# Altium PCB PCB2.PcbDoc
Units mm, origin at the board's own origin, x right, y up, seen from the top; angles counter-clockwise.
Board outline 40.62 x 61.3 mm, 2 copper layers (Top Layer, Bottom Layer); 21 components, 16 nets, 87 pads, 113 vias.
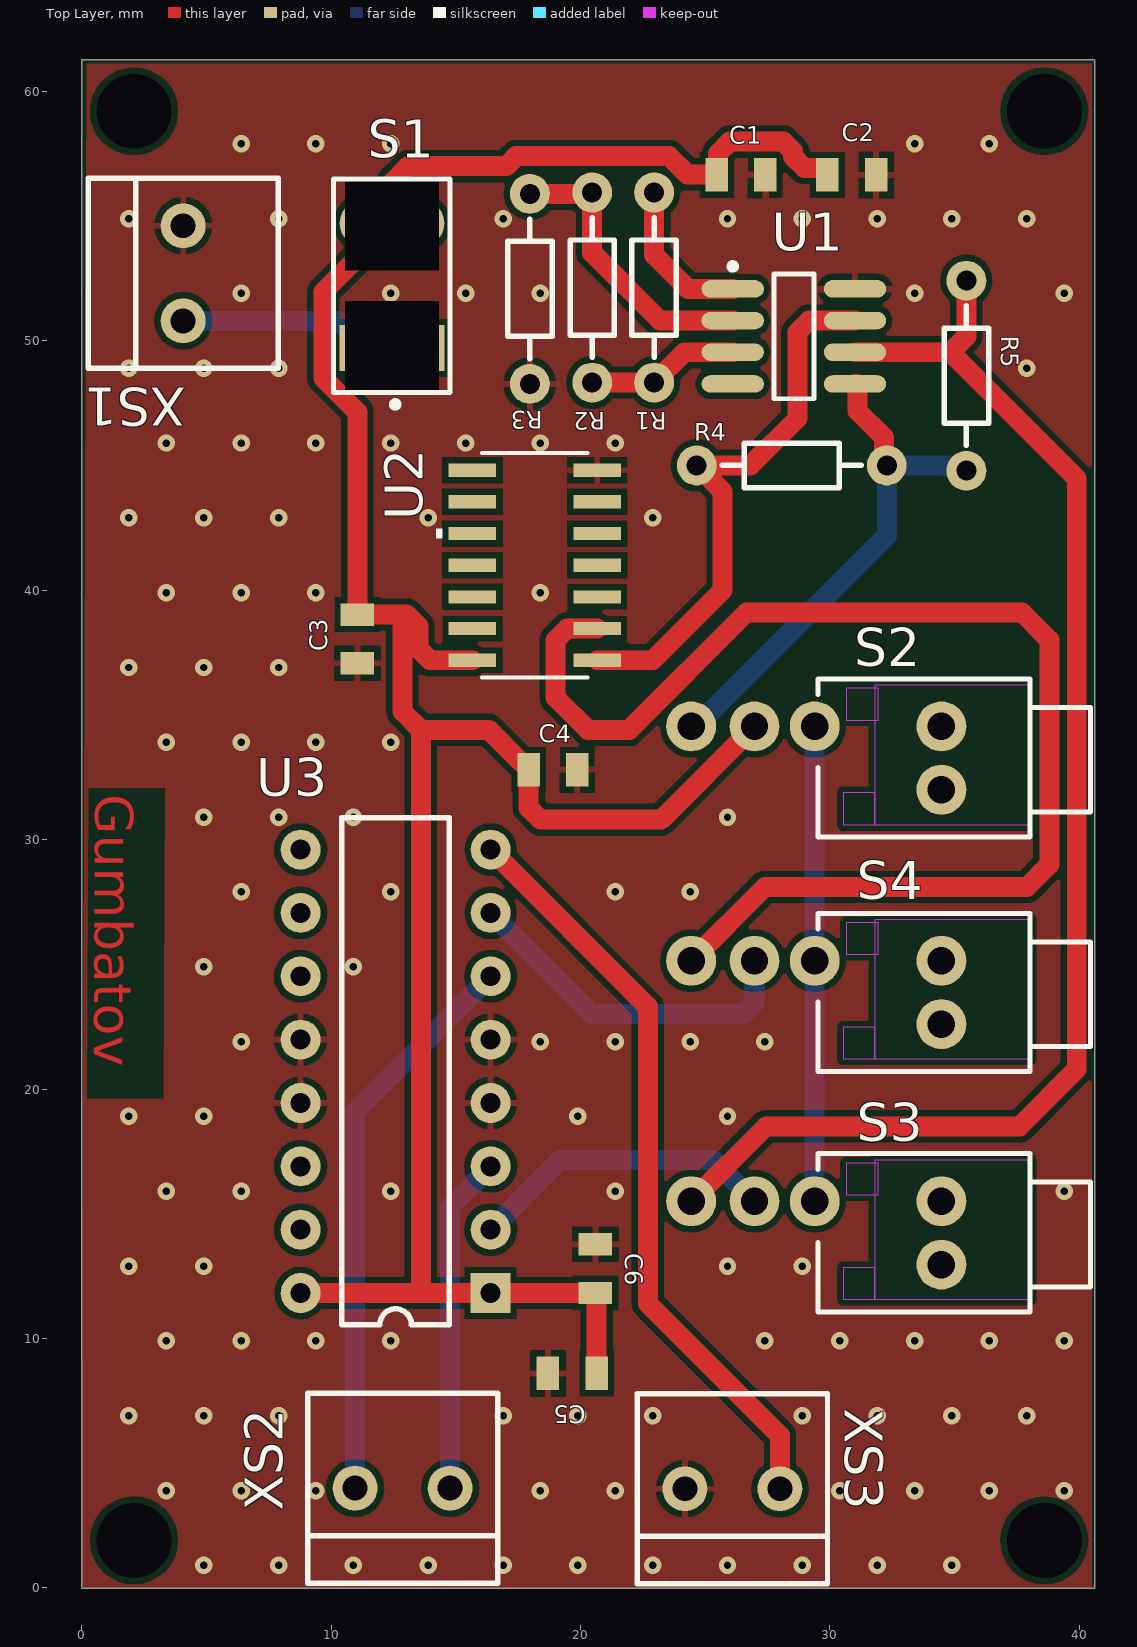
[diagram p0: Top Layer view]
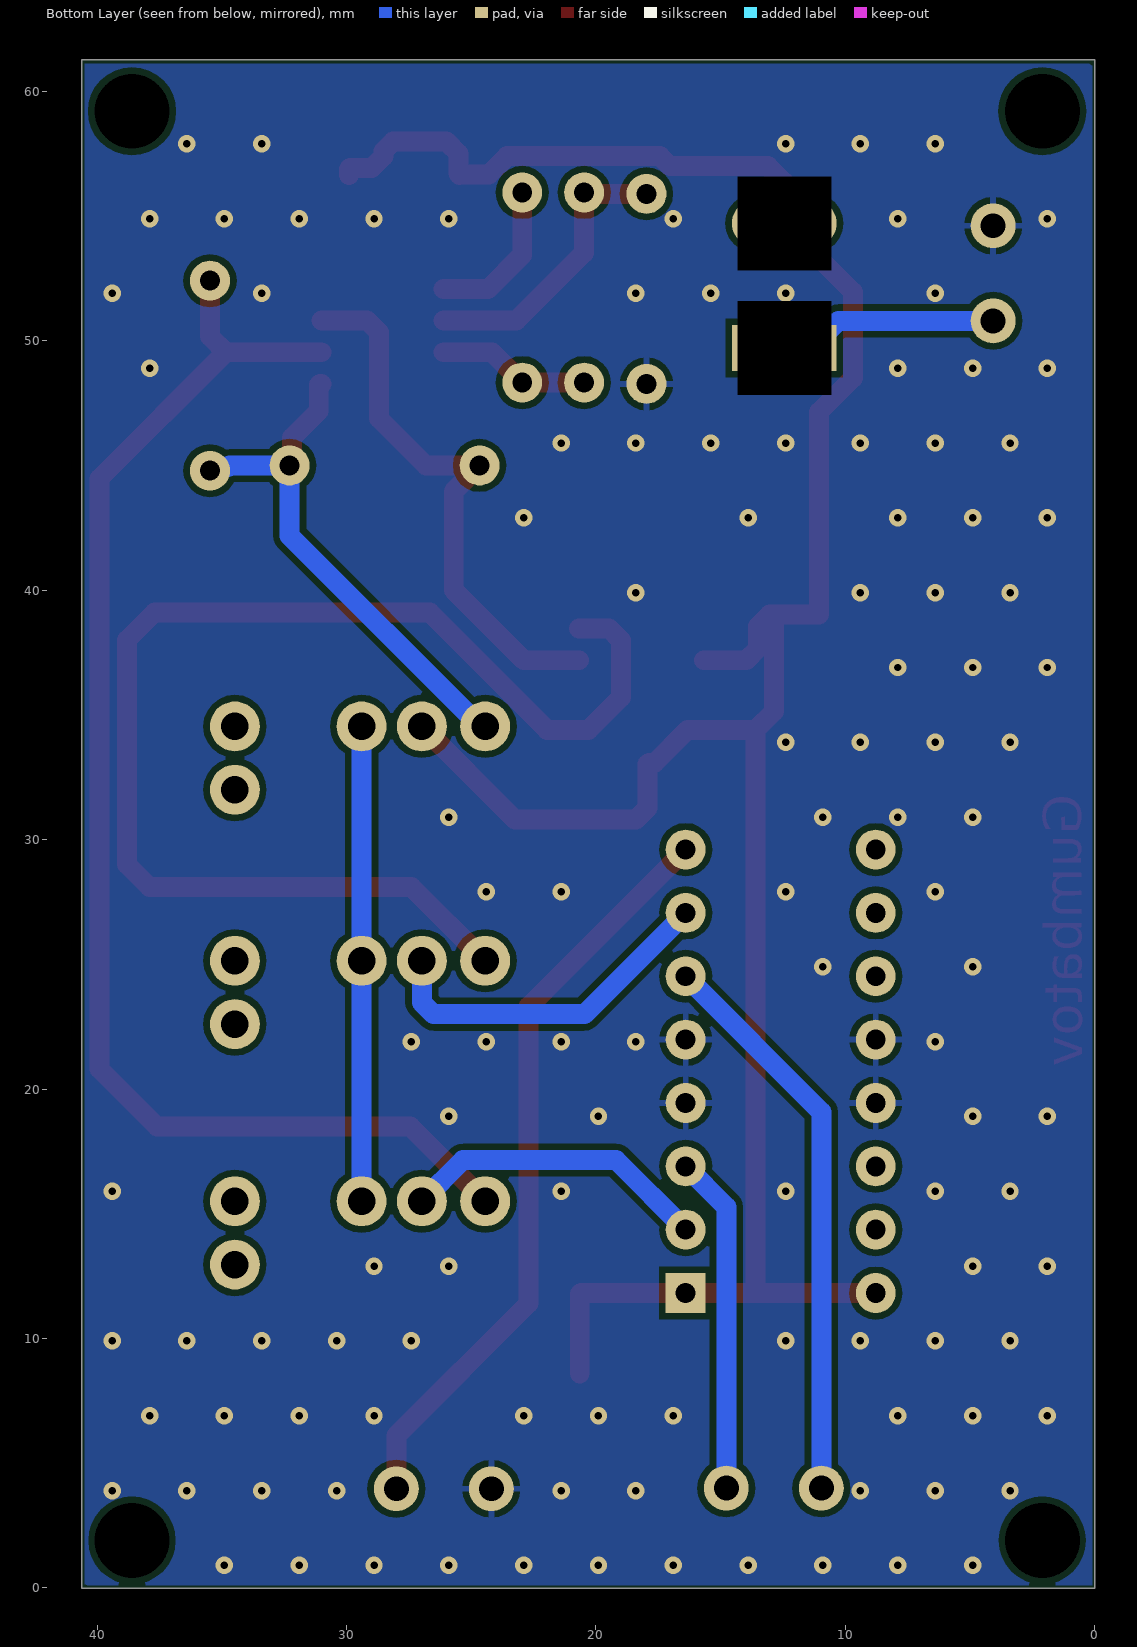
[diagram p1: Bottom Layer view, seen from below]
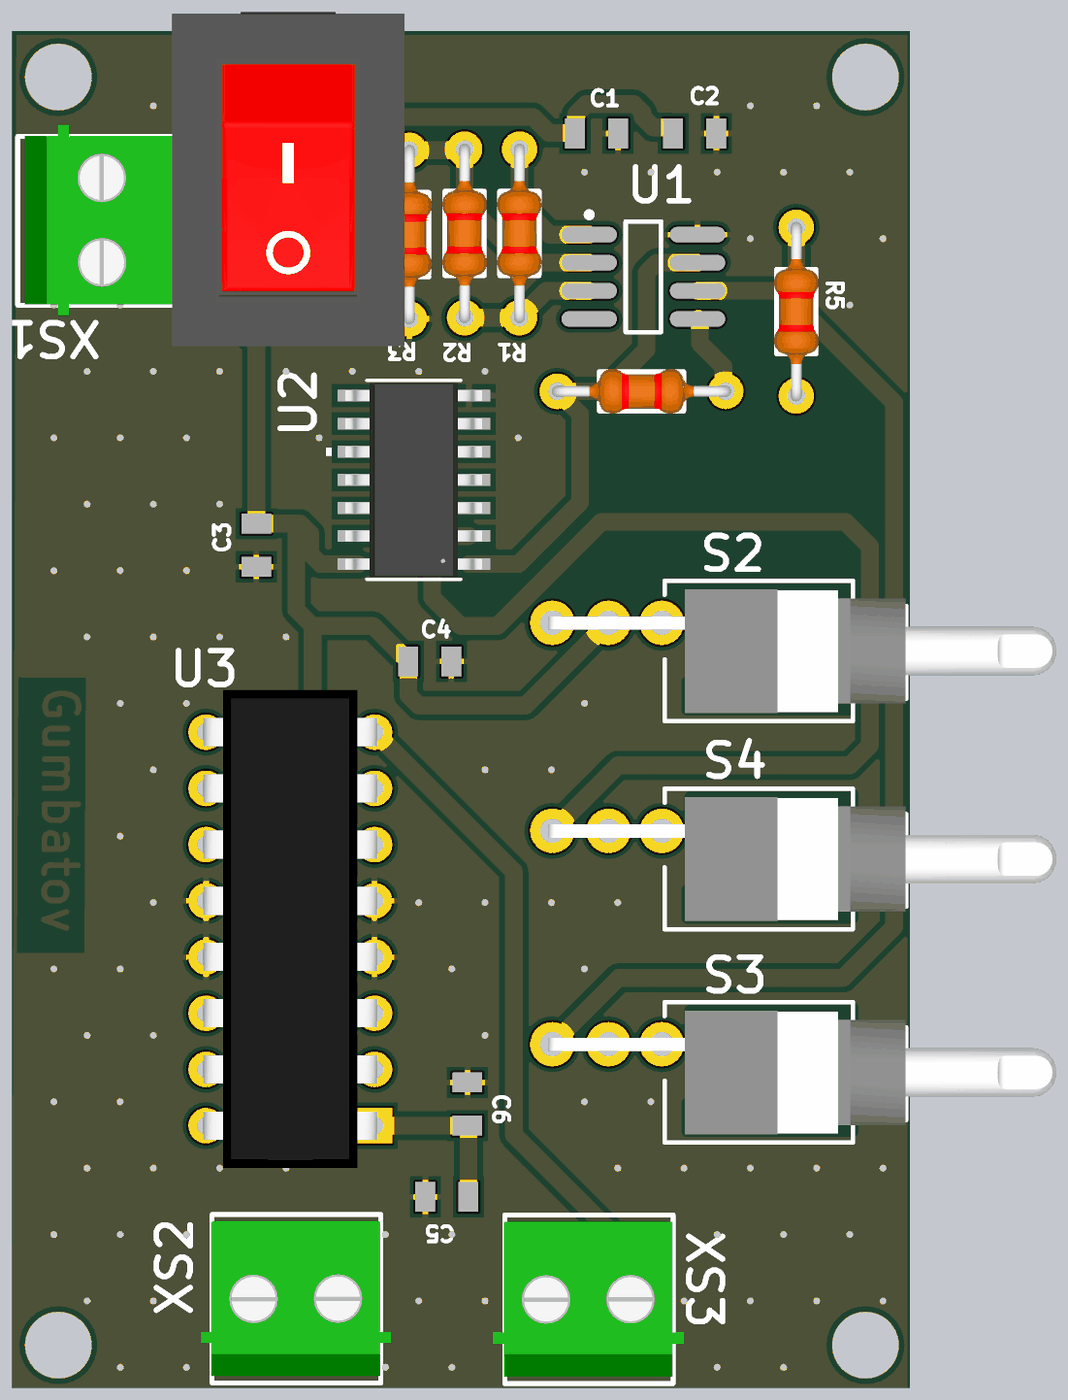
[diagram p2: 3D render of the assembled board from above, using the file's embedded part models]

## Layer stack, top to bottom
Top Solder: solder mask 0.0102, Solder Resist, Dk 3.5
Top Layer: signal copper 0.0356
Dielectric 1: dielectric 0.32, FR-4, Dk 4.8
Bottom Layer: signal copper 0.0356
Bottom Solder: solder mask 0.0102, Solder Resist, Dk 3.5

## Board outline
0,45.997 0,61.273 40.62,61.273 40.62,-0.023 0,-0.023

## Design rules (kind name [scope] priority, off if disabled: settings)
Clearance [All] p1: gap=0.254 ignorepadtopadclearanceinfootprint=FALSE except(0: Arc-Hole Track-Hole SMDPad-Hole THPad-Hole Via-Hole Fill-Hole Poly-Hole Region-Hole Text-Hole)
PolygonConnect PolygonConnect_Via [isVia] p1: connectstyle=Direct reliefconductorwidth=0.254 reliefentries=4 polygonreliefangle="90 Angle" airgapwidth=0.254
PolygonConnect [All] p2: connectstyle=Relief reliefconductorwidth=0.254 reliefentries=4 polygonreliefangle="90 Angle" airgapwidth=0.254
RoutingVias [All] p1: holewidth=0.711 width=1.27 viastyle="Through Hole" minholewidth=0.711 minwidth=1.27 maxholewidth=0.711 maxwidth=1.27
SolderMaskExpansion [All] p1: expansion=0.102 istentingtop=FALSE
Width [All] p1: maxlimit=0.8 minlimit=0.3 preferedwidth=0.3
30 further rules are at their usual default settings.

## Components (designator, comment, footprint, x,y, rotation, side; value= is the part's Value field where it differs from the comment)
C1 "CAP_0805" CAP0805 26.439,56.652 r0 top
C2 "CAP_0805" CAP0805 30.88,56.652 r0 top
C3 "CAP_0805" CAP0805 11.057,38.048 r270 top
C4 "CAP_0805" CAP0805 18.9,32.8 r0 top
C5 "CAP_0805" CAP0805 19.673,8.6 r180 top
C6 "CAP_0805" CAP0805 20.6,12.795 r90 top
R1 "RES-0.125" RES-0.125 22.953,52.135 r90 top
R2 "RES-0.125" RES-0.125 20.473,52.135 r270 top
R3 "RES-0.125" RES-0.125 17.973,52.08 r90 top
R4 "RES-0.125" RES-0.125 28.473,45 r0 top
R5 "RES-0.125" RES-0.125 35.473,48.6 r270 top
S1 "SW-Power" SPST-2 12.573,52.207 r90 top
S2 "SW-SPDT" TL36WW15050 29.52,33.524 r0 top
S3 "SW-LOG1" TL36WW15050 29.52,14.484 r0 top
S4 "SW-SPDT" TL36WW15050 29.52,24.124 r0 top (schematic designator S?)
U1 "LM56BIM/NOPB" M08A_M 28.557,50.175 r0 top
U2 "Part Number: 74HC04D" SOT108-1 18.173,41 r180 top value=Value
U3 "L293D" DIP16 16.4,11.82 r180 top
XS1 "DG340-3.81-02P" DG340-3.81-02P 4.073,54.61 r270 top
XS2 "DG340-3.81-02P" DG340-3.81-02P 10.963,4 r0 top
XS3 "DG340-3.81-02P" DG340-3.81-02P 24.191,3.973 r0 top

## Footprints (in the part's own frame and the unit in brackets; to place one, negate y for a bottom-side part, rotate by r counter-clockwise, add the part's x,y. Pads: shape width x height; smd on the part's side, far side on the other; paste and mask are expansions set on the pad)
CAP0805 [mm] "Chip Capacitor, 2-Leads, Body 2,00x1,20mm, IPC Medium Density"
  rect 0.9x1.35 smd: 1(-0.975,0) 2(0.975,0)
  body extent -1,-0.6 1,0.6, height 0.4
DG340-3.81-02P [mm]
  round 1.8 hole 1: 1(0,0) 2(3.81,0)
  silkscreen extent -1.91,-3.81 5.72,3.81, body extent -2.43,-3.49 6.19,3.51, height 8.5
DIP16 [mm]
  rect 1.6x1.6 hole 0.8: 1(0,0)
  round 1.6 hole 0.8: 2(0,-2.54) 3(0,-5.08) 4(0,-7.62) 5(0,-10.16) 6(0,-12.7) 7(0,-15.24) 8(0,-17.78) 9(7.62,-17.78) 10(7.62,-15.24) 11(7.62,-12.7) 12(7.62,-10.16) 13(7.62,-7.62) 14(7.62,-5.08) 15(7.62,-2.54) 16(7.62,0)
  silkscreen extent 1.65,-19.05 5.97,1.27, body extent -0.13,-19.68 7.75,1.9, height 4.19
M08A_M [mm] "SOIC, 8-Leads, Body 4.9x3.9mm, Pitch 1.27mm, IPC Low Density"
  oval 2.5x0.7 smd: 1(-2.45,1.905) 2(-2.45,0.635) 3(-2.45,-0.635) 4(-2.45,-1.905) 5(2.45,-1.905) 6(2.45,-0.635) 7(2.45,0.635) 8(2.45,1.905)
  silkscreen extent -2.57,-2.5 0.8,2.93, body extent -2,-2.5 2,2.5, height 1.75
RES-0.125 [mm]
  round 1.6 hole 0.8: 1(-3.81,0) 2(3.81,0)
  silkscreen extent -2.79,-0.89 2.79,0.89, body extent -4.05,-1 4.05,1, height 2.3
SOT108-1 [mil]
  rect 75x21 smd paste+0 mask+0: 1(-98.5,150) 2(-98.5,100) 3(-98.5,50) 4(-98.5,0) 5(-98.5,-50) 6(-98.5,-100) 7(-98.5,-150) 8(98.5,-150) 9(98.5,-100) 10(98.5,-50) 11(98.5,0) 12(98.5,50) 13(98.5,100) 14(98.5,150)
  silkscreen extent -84,-177 156,177, body extent -122,-172 122,172, height 69
SPST-2 [mm] "Switch; 2 Leads"
  rect 1.85x4.2 hole 3.75 square: 1(-2.5,0.125)
  oval 1.85x4.2 hole 3.75 square: 2(2.504,0.127)
  silkscreen extent -4.89,-2.2 4.28,2.47, body extent -5.25,-5.18 10.14,5.33, height 15.14
TL36WW15050 [mm] "Switch; 4 Leads"
  round 2 hole 1.1: 1(-0.127,1.016) 2(-2.54,1.016) 3(-5.08,1.016) M(4.953,-1.524) M(4.953,1.016)
  Top Layer keep-out region: 2.286,2.667 2.286,-2.921 8.509,-2.921 8.509,2.667
  Top Layer keep-out region: 1.143,2.54 1.143,1.27 2.413,1.27 2.413,2.54
  Top Layer keep-out region: 1.016,-1.651 1.016,-2.921 2.286,-2.921 2.286,-1.651
  silkscreen extent 0,-3.43 10.92,2.92, body extent -5.28,-3.06 17.72,2.54, height 8.2

## Part data
C1 C2 C3 C4 C5 C6: "Ceramic capacitor, 0805"
  C1 C3 C5: Val=10u
  C2 C4 C6: Val=0.1u
S1: library part SW-SPST, "Single-Pole, Single-Throw Switch", LatestRevisionDate=17-Jul-2002, LatestRevisionNote="Re-released for DXP Platform.", PackageDescription="Switch; 2 Leads", PackageReference=SPST-2, Published=24-Mar-1999, Publisher="Altium Limited"
S2 S4: "SPDT Subminiature Toggle Switch, Right Angle Mounting, Vertical Actuation", ComponentLink1Description="Manufacturer Link", ComponentLink1URL=http://www.apem.com, DatasheetVersion=05-Dec-2000, LatestRevisionDate=17-Dec-2003, LatestRevisionNote="Schematic revised, PCB Footprint replaced.", PackageDescription="Switch; 4 Leads", PackageReference=TL36WW15050, Published=24-Mar-1999, Publisher="Altium Limited"
S3: library part SW-SPDT, "SPDT Subminiature Toggle Switch, Right Angle Mounting, Vertical Actuation", ComponentLink1Description="Manufacturer Link", ComponentLink1URL=http://www.apem.com, DatasheetVersion=05-Dec-2000, LatestRevisionDate=17-Dec-2003, LatestRevisionNote="Schematic revised, PCB Footprint replaced.", PackageDescription="Switch; 4 Leads", PackageReference=TL36WW15050, Published=24-Mar-1999, Publisher="Altium Limited"
U1: "Dual Output Low Power Thermostat, 8-pin Narrow SOIC, Pb-Free", Manufacturer="National Semiconductor", PackageTopMarking=NSZXTT*LM56*BIM, PowerWise=Y, Code_IPC=SOIC127P600-8, Code_JEDEC=MS-012-AA, ComponentLink1Description="LM56 Datasheet", ComponentLink1URL=http://www.national.com/ds/LM/LM56.pdf, ComponentLink2Description="LM56 Web Page", ComponentLink2URL=http://www.national.com/pf/LM/LM56.html, ComponentLink3Description="M08A Package Page", ComponentLink3URL=http://www.national.com/packaging/folders/m08a.html, CompType=OtherParts, DatasheetVersion=Aug-2009, PackageDescription="SOIC Narrow, 4.9 x 3.9 x 1.45mm, 8 Lead, 1.27mm Pitch", PackageReference=M08A, PackageVersion="revM, May-2009", PartNumber=LM56BIM/NOPB, PinCount=8, RevisionNote="Component URLs added", RoHS=Y
U2: library part 74HC04D, "No Description Available", Copyright="Copyright (C) 2016 Accelerated Designs. All rights reserved", Manufacturer_Part_Number=74HC04D, RefDes=RefDes, Type=DEV, Vendor=Nexperia
R1: Val=15.1K
R2: Val=380OM
R3: Val=11.5K
R4 R5: Val=100K

## Free pads (board coordinates)
  round 1.524 hole 3: 7(2.1,1.9) 7(2.1,59.2) 7(38.6,1.9) 7(38.6,59.2)

## Via types
v1: diameter 0.7, hole 0.3, Top Layer to Bottom Layer, tented both sides, 113 vias

## Nets (pads, with @x,y where several pads share a name; then routed paths per layer and width w, separated by ;. In a path a pad name is that pad's centre, name@x,y a point inside that pad or via, vN(x,y) a via of type N, cw(c..) or ccw(c..) an arc to the next point about the centre after c; other vN are vias at no path point)
GND: C1.2 C2.2 C3.2 C4.2 C5.2 C6.2 R3.1 U1.8 U2.7 U3.4 U3.5 U3.12 U3.13 XS1.1 XS3.1
  other v1: 4.896,0.9 7.896,0.9 10.896,0.9 13.896,0.9 16.896,0.9 19.896,0.9 22.896,0.9 25.896,0.9 28.896,0.9 31.896,0.9 34.896,0.9 3.396,3.9 6.396,3.9 9.396,3.9 18.396,3.9 21.396,3.9 30.396,3.9 33.396,3.9 36.396,3.9 39.396,3.9 1.896,6.9 4.896,6.9 7.896,6.9 16.896,6.9 19.896,6.9 22.896,6.9 28.896,6.9 31.896,6.9 34.896,6.9 37.896,6.9 3.396,9.9 6.396,9.9 9.396,9.9 12.396,9.9 27.396,9.9 30.396,9.9 33.396,9.9 36.396,9.9 39.396,9.9 1.896,12.9 4.896,12.9 25.896,12.9 28.896,12.9 3.396,15.9 6.396,15.9 12.396,15.9 21.396,15.9 39.396,15.9 1.896,18.9 4.896,18.9 19.896,18.9 25.896,18.9 6.396,21.9 18.396,21.9 21.396,21.9 24.396,21.9 27.396,21.9 4.896,24.9 10.896,24.9 6.396,27.9 12.396,27.9 21.396,27.9 24.396,27.9 4.896,30.9 7.896,30.9 10.896,30.9 25.896,30.9 3.396,33.9 6.396,33.9 9.396,33.9 12.396,33.9 1.896,36.9 4.896,36.9 7.896,36.9 3.396,39.9 6.396,39.9 9.396,39.9 18.396,39.9 1.896,42.9 4.896,42.9 7.896,42.9 13.896,42.9 22.896,42.9 3.396,45.9 6.396,45.9 9.396,45.9 12.396,45.9 15.396,45.9 18.396,45.9 21.396,45.9 1.896,48.9 4.896,48.9 7.896,48.9 37.896,48.9 6.396,51.9 12.396,51.9 15.396,51.9 18.396,51.9 33.396,51.9 39.396,51.9 1.896,54.9 7.896,54.9 16.896,54.9 25.896,54.9 28.896,54.9 31.896,54.9 34.896,54.9 37.896,54.9 6.396,57.9 9.396,57.9 12.396,57.9 33.396,57.9 36.396,57.9
NetR1_1: R1.1 R2.2 U1.3 | length 6.1
  Top Layer w0.8: R2.2 R1.1 24.168,49.54 U1.3
NetR1_2: R1.2 U1.1 | length 6.2
  Top Layer w0.8: R1.2 22.953,53.447 24.32,52.08 U1.1
NetR2_1: R2.1 R3.2 U1.2 | length 11.7
  Top Layer w0.8: R3.2 20.418,55.89 R2.1 20.473,53.527 23.19,50.81 U1.2
NetR4_1: R4.1 U1.7 U2.1 | length 22.4
  Top Layer w0.8: U2.1 22.89,37.19 25.7,40 25.7,43.963 R4.1 26.814,45 28.7,46.886 28.7,50.341 29.169,50.81 U1.7
NetR4_2: R4.2 R5.2 S2.3 U1.5 | length 20.9
  Top Layer w0.8: U1.5 31.061,48.27 31.111,48.22 31.111,47.189 32.177,46.123 32.177,45.106 R4.2
  Bottom Layer w0.8: S2.3 24.64,34.54 32.283,42.183 R4.2 34.697,45 34.754,44.943 35.32,44.943 R5.2
NetR5_1: R5.1 S3.3 U1.6 | length 55.5
  Top Layer w0.8: S3.3 27.44,18.5 37.6,18.5 39.9,20.8 39.9,44.48 34.84,49.54 ; U1.6 34.84,49.54 ; R5.1 35.473,50.173 34.84,49.54
NetS1_1: S1.1 XS1.2 | length 8.9
  Bottom Layer w0.8: XS1.2 10.279,50.8 10.748,50.331 10.748,50.232 11.273,49.707 S1.1
NetS2_1: S2.1 S3.1 S4.1 | length 19
  Bottom Layer w0.8: S3.1 S4.1 S2.1
NetS3_2: S3.2 U3.2 | length 12.4
  Bottom Layer w0.8: U3.2 19.194,17.154 25.326,17.154 S3.2
NetS4_2: S4.2 U3.7 | length 14.1
  Bottom Layer w0.8: U3.7 20.46,23 26.511,23 26.98,23.469 S4.2
NetS4_3: S4.3 U2.2 | length 51.9
  Top Layer w0.8: U2.2 19.469,38.46 19,37.991 19,35.7 20.3,34.4 21.96,34.4 26.66,39.1 37.7,39.1 38.8,38 38.8,29 37.9,28.1 27.4,28.1 S4.3
NetU3_3: U3.3 XS2.2 | length 13.6
  Bottom Layer w0.8: XS2.2 14.773,15.273 U3.3
NetU3_6: U3.6 XS2.1 | length 22.8
  Bottom Layer w0.8: XS2.1 10.963,19.083 U3.6
NetU3_8: U3.8 XS3.2 | length 30.4
  Top Layer w0.8: U3.8 22.7,23.3 22.7,11.4 28.001,6.099 XS3.2
VCC: C1.1 C2.1 C3.1 C4.1 C5.1 C6.1 S1.2 S2.2 U2.14 U3.1 U3.16 | length 105.5
  Top Layer w0.8: U3.16 13.6,11.82 ; U2.14 13.969,37.19 13.5,37.659 13.5,38.554 13.031,39.023 ; C5.1 20.648,11.772 C6.1 U3.1 13.6,11.82 ; S2.2 23.24,30.8 18.4,30.8 17.925,31.275 C4.1 17.925,33.025 17.875,33.075 17.65,33.075 16.325,34.4 13.6,34.4 ; C2.1 29.905,56.877 29.855,56.927 28.986,56.927 28.518,57.396 28.518,57.598 28.134,57.981 25.982,57.981 25.514,57.512 25.514,56.702 C1.1 25.443,56.672 24.282,56.672 23.555,57.399 17.425,57.399 17.026,57 13.1,57 12.467,56.367 12.467,54.732 S1.2 11.641,54.711 11.155,54.226 11.155,53.421 9.694,51.959 9.694,48.511 11.057,47.148 C3.1 13.031,39.023 ; 13.031,39.023 12.863,38.855 12.863,35.137 13.6,34.4 ; 13.6,11.82 13.6,34.4
pads on no net: S2.M S3.M S4.M U1.4 U2.3 U2.4 U2.5 U2.6 U2.8 U2.9 U2.10 U2.11 U2.12 U2.13 U3.9 U3.10 U3.11 U3.14 U3.15

## Polygon pours and split planes (outlines as drawn)
GND on Top Layer "GND_L01_P078" (solid, remove dead copper, pour order 78): 0.2,61.1 40.5,61.1 40.5,0 0,0
GND on Top Layer "GND_L01_P076" (solid, remove dead copper, pour order 76): 0.2,61.1
GND on Top Layer "GND_L01_P056" (solid, remove dead copper, pour order 56): 1.673,61.1
GND on Top Layer "GND_L01_P016" (solid, remove dead copper, pour order 16): 53.173,7.2
GND on Top Layer "GND_L01_P032" (solid, remove dead copper, pour order 32): -3.427,-5.1
GND on Bottom Layer "GND_L02_P080" (solid, remove dead copper, pour order 80): 0.1,61.2 0.2,61.1 40.5,61.1 40.5,0 40.4,0.1 0.1,0.1
GND on Bottom Layer "GND_L02_P070" (solid, remove dead copper, pour order 70): 0.1,61.2
GND on Bottom Layer "GND_L02_P022" (solid, remove dead copper, pour order 22): -4.327,1.6
GND on Bottom Layer "GND_L02_P028" (solid, remove dead copper, pour order 28): 65.273,18.3

## Other copper
Top Layer:
  text "Gumbatov" at 0.546,31.818 h1.52 r269.72

## Silkscreen, mask and mechanical layers (free items; w line width, h text height)
Board:
  lines w0.254: -0.127,-0.2 -0.127,61.4 40.748,61.4 40.748,-0.2 -0.127,-0.2
Mechanical 13:
  lines w0.254: -0.127,-0.15 40.748,-0.15 40.748,61.4 -0.127,61.4 -0.127,-0.15

## Dimensions
40.748,-0.15 to -0.127,-0.15 on Mechanical 13
40.748,-0.15 to 40.748,61.4 on Mechanical 13

## Text inside footprints (layer, text, board x,y; h text height)
U2: Mechanical 13 "*" at 20.103,37.977 h1.27 r180